# Altium PCB MCORD_AFE.PCBDOC (part 1 of 3)
Units mil, origin at the board's own origin, x right, y up, seen from the top; angles counter-clockwise.
Board outline 2755.91 x 787.4 mil, 4 copper layers (TOP, G1, PWR, BOT), stack 58.685 mil thick; 135 components, 89 nets, 442 pads, 254 vias.
Unrouted connection lines stored in the file: 2.
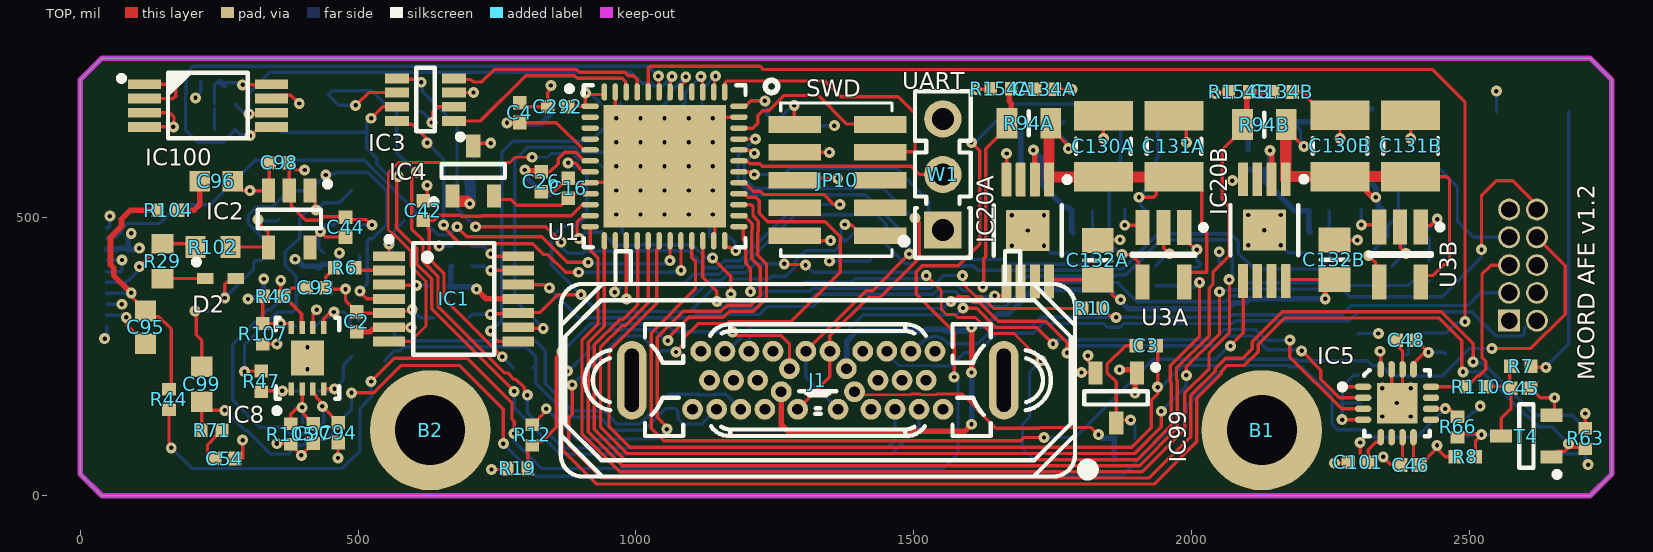
[diagram p0: TOP view]
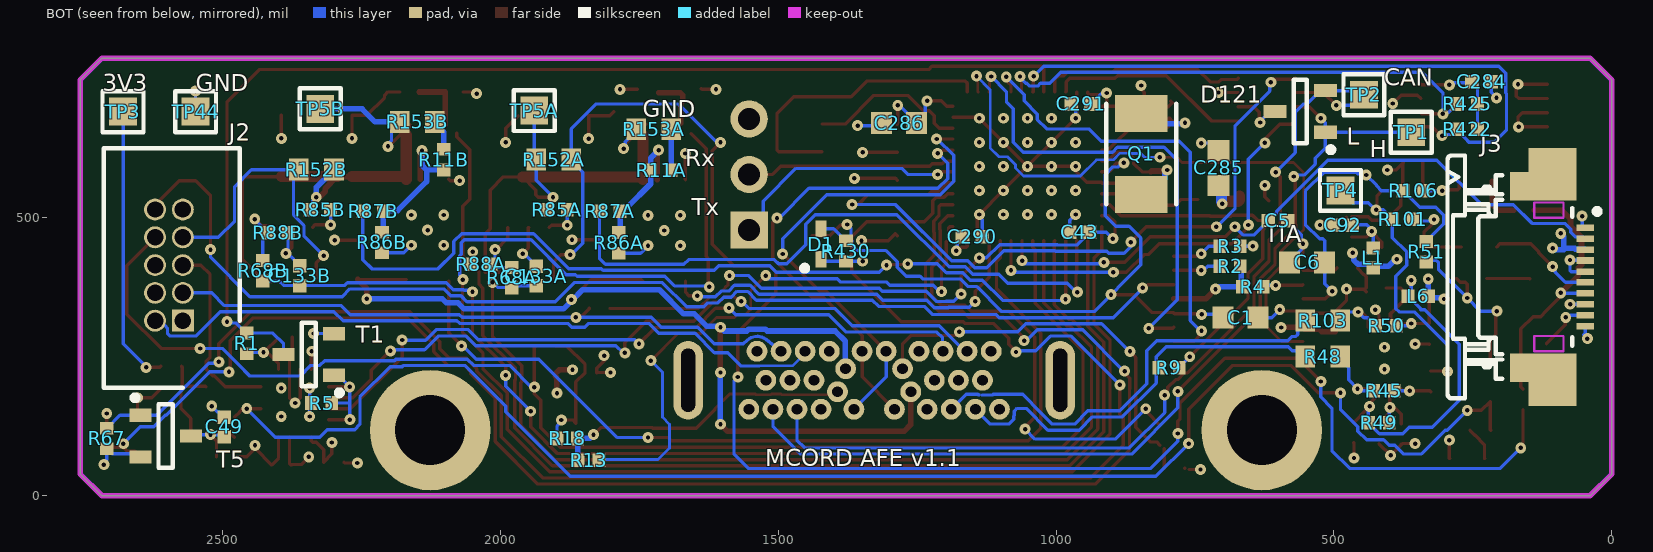
[diagram p1: BOT view, seen from below]
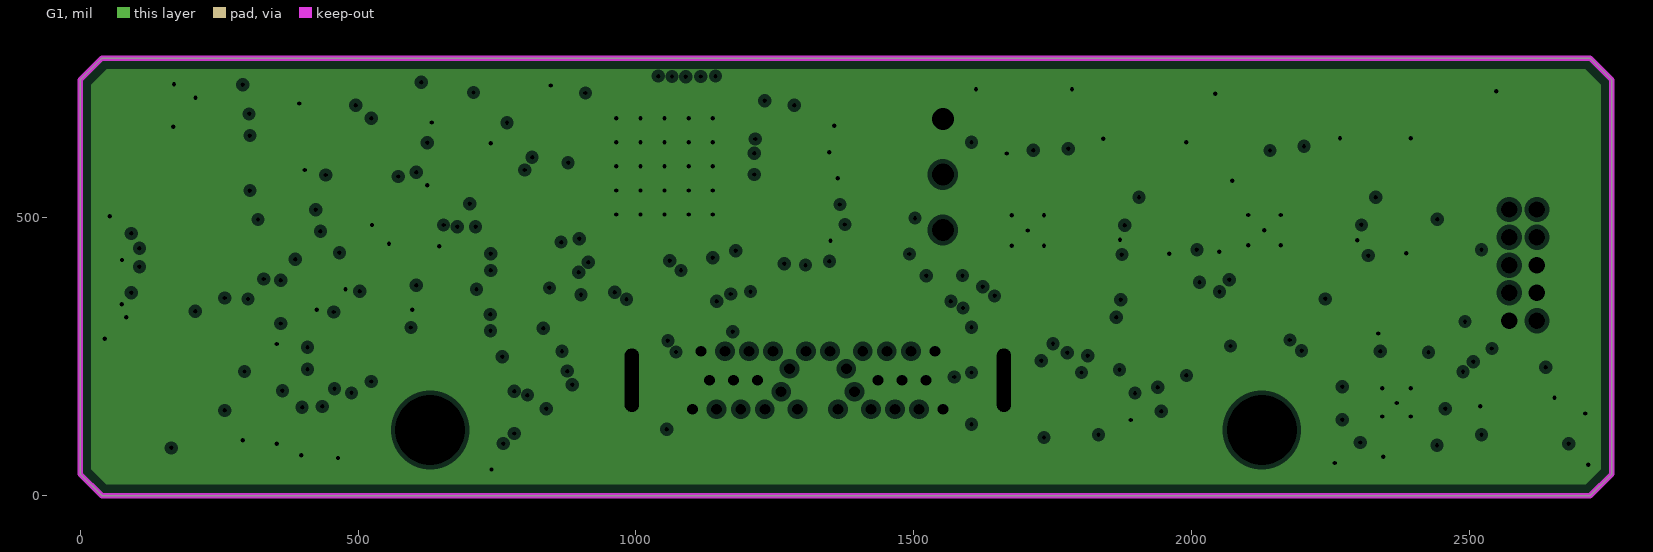
[diagram p2: G1, clearances drawn from the general rule]
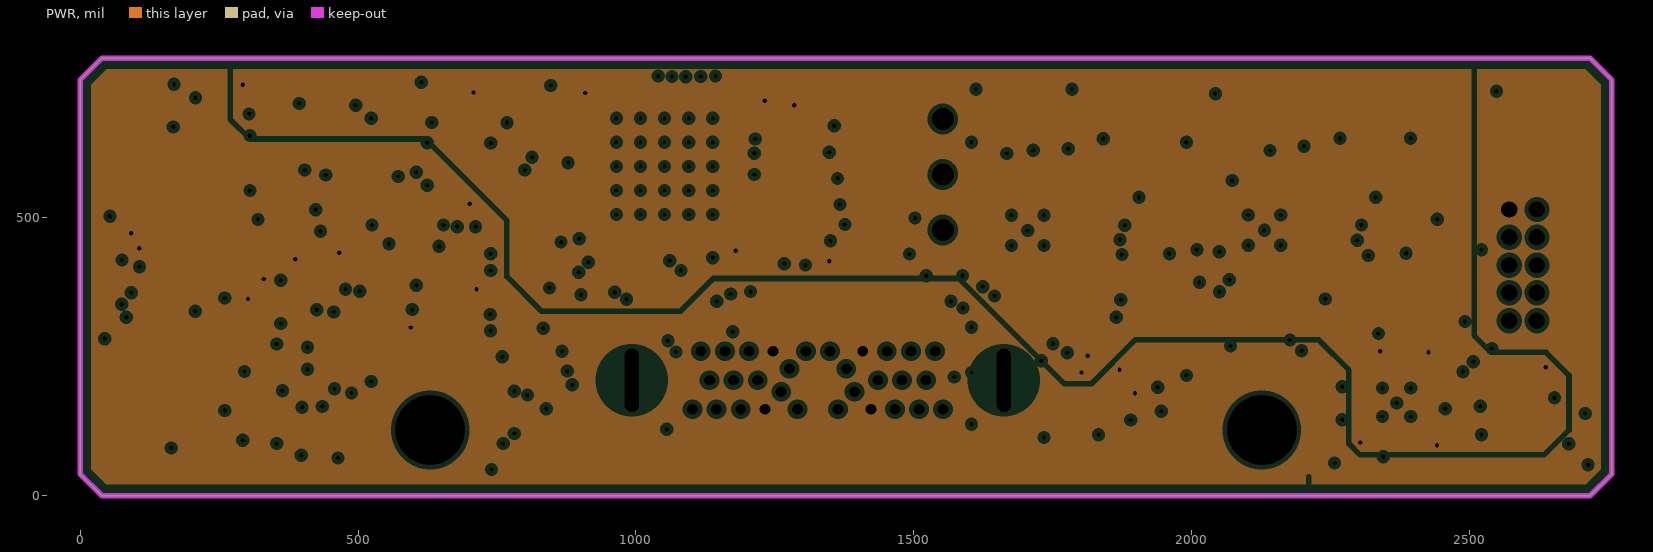
[diagram p3: PWR, clearances drawn from the general rule]
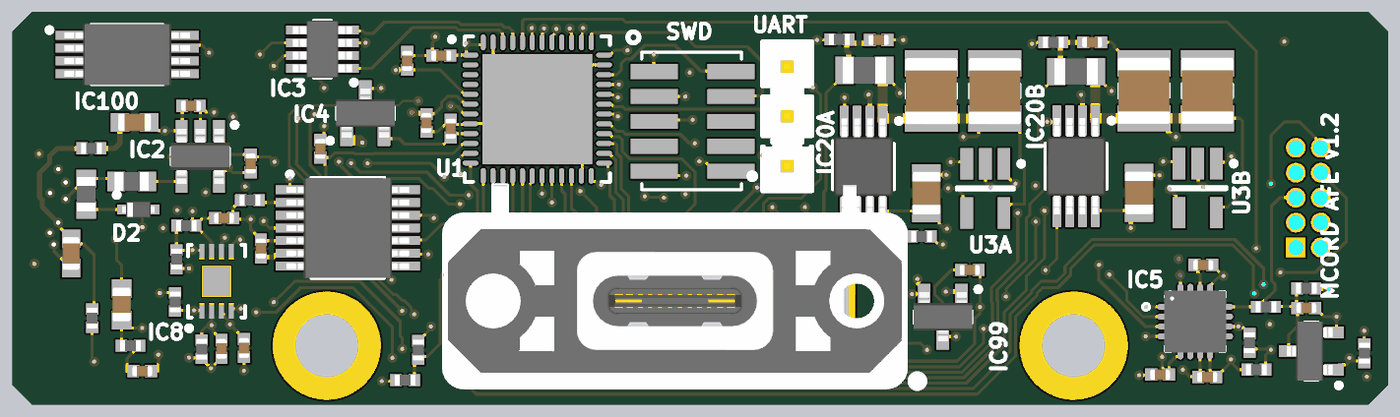
[diagram p5: 3D render of the assembled board from above, using the file's embedded part models]
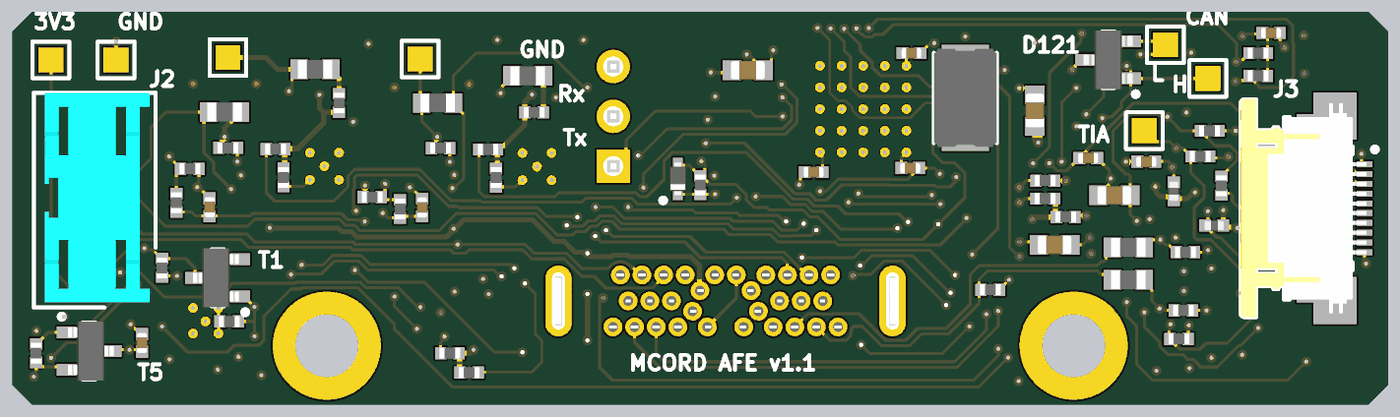
[diagram p6: 3D render of the assembled board from below, using the file's embedded part models]

## Layer stack, top to bottom
TopSolder: solder mask 0.3937, Solder Resist, Dk 3.5
TOP: signal copper 1.3778
Dielectric1: prepreg 7.0866, FR-4, Dk 4.8
G1: plane copper 1.3779, net GND
Dielectric2: core 39, Core-042, Dk 4.6
PWR: plane copper 1.3779, net (Multiple Nets)
Dielectric3: prepreg 7.0866, FR-4, Dk 4.8
BOT: signal copper 1.3778
BottomSolder: solder mask 0.3937, Solder Resist, Dk 3.5

## Board outline
0,39.37 0,748.03 39.37,787.4 2716.54,787.4 2755.91,748.03 2755.91,39.37 2716.54,0 39.37,0

## Design rules (kind name [scope] priority, off if disabled: settings)
AcuteAngle [All] p1: minimum=6.00000000000000E+0001 checktracksonly=FALSE
BoardOutlineClearance [All] p1: gap=10 ignorepadtopadclearanceinfootprint=FALSE except(0: Arc-SplitContinuation Track-SplitContinuation SMDPad-SplitContinuation THPad-SplitContinuation Via-SplitContinuation Fill-SplitContinuation Poly-SplitContinuation Region-SplitContinuation Text-SplitContinuation)
Clearance keepout [All vs OnLayer('KeepOutLayer')] p1: gap=3.94 ignorepadtopadclearanceinfootprint=FALSE
Clearance [All] p2: gap=5 ignorepadtopadclearanceinfootprint=FALSE
Creepage [All] p1: checkdistance=10
DiffPairsRouting [All] p1: maxlimit=20 minlimit=15 mostfreqgap=17 toplayer_minwidth=15 toplayer_maxwidth=15 toplayer_prefwidth=15 bottomlayer_minwidth=15 bottomlayer_maxwidth=15 bottomlayer_prefwidth=15 maxuncoupledlength=500
HoleSize [All] p1: absolutevalues=TRUE maxlimit=200 minlimit=1 maxpercent=80.000 minpercent=20.000
MinimumSolderMaskSliver [All] p1: minsoldermaskwidth=0
MinimumSolderMaskSliver SilkscreenOverComponentPads [All] p2: minsoldermaskwidth=0
PlaneClearance [All] p1: clearance=8
PlaneConnect PlaneConnect_pad [(InPadClass('All Pads'))] p1: planeconnectstyle=Relief reliefexpansion=5 reliefentries=4 reliefconductorwidth=5 reliefairgap=5
PlaneConnect [All] p2: planeconnectstyle=Direct reliefexpansion=20 reliefentries=4 reliefconductorwidth=10 reliefairgap=10
PolygonConnect PolygonConnect_pad [(InPadClass('All Pads'))] p1: connectstyle=Relief reliefconductorwidth=5 reliefentries=4 polygonreliefangle="90 Angle" airgapwidth=5
PolygonConnect [All] p2: connectstyle=Direct reliefconductorwidth=10 reliefentries=4 polygonreliefangle="90 Angle" airgapwidth=10
RoomDefinition U_Detector0 [InComponentClass('U_Detector0')] p1 off: confinementstyle=ConfineIn formatcopy=TRUE lockcomponents=FALSE outline 118.11,710.1 118.11,111.52 495.54,111.52 495.54,710.1
RoomDefinition U_Supply0 [InComponentClass('U_Supply0')] p2 off: confinementstyle=ConfineIn formatcopy=TRUE lockcomponents=FALSE outline 1616.96,316.72 2030.96,316.72 2030.96,735.27 1616.96,735.27
RoomDefinition U_Supply1 [InComponentClass('U_Supply1')] p3 off: confinementstyle=ConfineIn formatcopy=TRUE lockcomponents=FALSE outline 2042.75,317.35 2456.75,317.35 2456.75,735.9 2042.75,735.9
RoomDefinition U_CAN_controller [InComponentClass('U_CAN_controller')] p4 off: confinementstyle=ConfineIn formatcopy=TRUE lockcomponents=FALSE outline 629.92,381.35 1499,381.35 1499,771.35 629.92,771.35
RoomDefinition MCORD_AFE [InComponentClass('MCORD_AFE')] p5 off: confinementstyle=ConfineIn formatcopy=TRUE lockcomponents=FALSE outline 2406.69,47.32 2679.39,47.32 2679.39,151.82 2406.69,151.82
RoutingVias [All] p1: holewidth=7.87 width=19.68 viastyle="Through Hole" minholewidth=7.87 minwidth=19.68 maxholewidth=19.68 maxwidth=39.37 useviatemplates=TRUE viatemplateguid#1={CDEADCA3-E7C7-4804-AE0A-CD5C500E45C9} viatemplatename#1=v50h20m0mx0
SilkToSilkClearance [All] p1: silktosilkclearance=0
SilkToSolderMaskClearance [IsPad] p1: minsilkscreentomaskgap=0 clearancetoexposedcopper=TRUE
SolderMaskExpansion [All] p1: expansion=4 istentingtop=FALSE
ViasUnderSMD ViasUnderSMD_allow [InComponent('IC18') or InComponent('IC10') or InComponent('IC13') or InComponent('IC14') or InComponent('IC15')] p1: allowed=TRUE
ViasUnderSMD [All] p2: allowed=FALSE
Width Width_1 [(InDifferentialPairClass('All Differential Pairs'))] p1: maxlimit=8 minlimit=8 preferedwidth=8
Width [All] p2: maxlimit=100 minlimit=5 preferedwidth=6
23 further rules are at their usual default settings.

## Classes and differential pairs
component class U_Supply0: C130A C131A C132A C133A C134A IC20A R11A R68A R85A R86A R87A R88A R94A R152A R153A R154A TP5A U3A
channel class Supply: U_Supply0 U_Supply1
component class U_Supply1: C130B C131B C132B C133B C134B IC20B R11B R68B R85B R86B R87B R88B R94B R152B R153B R154B TP5B U3B
component class U_Detector0: C6 C44 C54 C92 C93 C94 C95 C96 C97 C98 C99 D2 IC2 IC8 J3 L1 L6 R29 R44 R45 R46 R47 R48 R49 R50 R51 R71 R101 R102 R103 R104 R105 R106 R107 TP4
component class MCORD_AFE: B1 B2 C45 C46 C48 C49 C101 IC5 J1 J2 R1 R5 R7 R8 R9 R10 R12 R13 R18 R19 R63 R66 R67 R110 T1 T4 T5
component class U_CAN_controller: C1 C2 C3 C4 C5 C16 C26 C42 C43 C284 C285 C286 C290 C291 C292 D1 D121 IC1 IC3 IC4 IC11 IC99 IC100 JP10 L10 Q1 R2 R3 R4 R6 R11 R22 R422 R425 R430 TP1 TP2 TP3 TP44 U1 W1

## Components (designator, comment, footprint, x,y, rotation, side; value= is the part's Value field where it differs from the comment)
B1 "Plated Hole" MTG320_550 2125.98,118.11 r0 top locked
B2 "Plated Hole" MTG320_550 629.92,118.11 r0 top locked
C1 "1uF" CAPC1608X87N 668.05,320.4 r0 bottom
C2 "100nF" CAPC1005X55N 498,313 r270 top
C3 "1nF" CAPC1005X55N 1917.92,269.84 r0 top
C4 "22pF" CAPC1005X55N 790.91,689.2 r270 top
C5 "1nF" CAPC1005X55N 600.76,494.38 r0 bottom
C6 "1uF" CAPC1608X87N 548.39,419.85 r180 bottom
C16 "100nF" CAPC1005X55N 878,553.13 r270 top
C26 "22pF" CAPC1005X55N 829.47,564.82 r90 top
C42 "1nF" CAPC1005X55N 617,513 r270 top
C43 "1nF" CAPC1005X55N 957.39,474.36 r180 bottom
C44 "1nF" CAPC1005X55N 477.53,483.3 r270 top
C45 "1nF" CAPC1005X55N 2592,193.72 r180 top
C46 "100nF" CAPC1005X55N 2393.73,55.32 r0 top
C48 "1nF" CAPC1005X55N 2385.64,280 r0 top
C49 "1nF" CAPC1005X55N 2496.23,123.7 r270 bottom
C54 "1nF" CAPC1005X55N 260.29,67 r180 top
C92 "100nF" CAPC1005X55N 484.52,487.05 r180 bottom
C93 "1nF" CAPC1005X55N 424.18,373.92 r180 top
C94 "100nF" CAPC1005X55N 464.23,113.55 r90 top
C95 "100nF" CAPC1608X90N 117.74,303.01 r90 top
C96 "100nF" CAPC1608X90N 244.94,565.94 r180 top
C97 "100nF" CAPC1005X55N 419.11,111.98 r90 top
C98 "22pF" CAPC1005X55N 357.89,599.09 r180 top
C99 "10pF" CAPC1608X87N 218.95,200.79 r90 top
C101 "100nF" CAPC1005X55N 2299.26,60.19 r0 top
C130A "2.2uF" CAPC3225X230N 1840.96,628.67 r270 top (schematic designator C130)
C130B "2.2uF" CAPC3225X230N 2266.75,629.3 r270 top (schematic designator C130)
C131A "2.2uF" CAPC3225X230N 1967.96,628.67 r270 top (schematic designator C131)
C131B "2.2uF" CAPC3225X230N 2393.75,629.3 r270 top (schematic designator C131)
C132A "1uF" CAPC2013X145N 1830.96,423.92 r270 top (schematic designator C132)
C132B "1uF" CAPC2013X145N 2256.75,424.55 r270 top (schematic designator C132)
C133A "100nF" CAPC1005X55N 1934.96,395.27 r270 bottom (schematic designator C133)
C133B "100nF" CAPC1005X55N 2360.75,395.9 r270 bottom (schematic designator C133)
C134A "100nF" CAPC1005X55N 1735.26,731.11 r180 top (schematic designator C134)
C134B "100nF" CAPC1005X55N 2163.07,726.43 r180 top (schematic designator C134)
C284 "100nF" CAPC1005X55N 234.49,745.19 r0 bottom
C285 "1uF" CAPC1608X87N 707.69,589.72 r270 bottom
C286 "1uF" CAPC1608X87N 1282.57,670.53 r180 bottom
C290 "100nF" CAPC1005X55N 1150.6,466.1 r0 bottom
C291 "100nF" CAPC1005X55N 954.9,704.82 r180 bottom
C292 "100nF" CAPC1005X55N 859.26,699.78 r0 top
D1 "1PS79SB70" SODFL1608X65N 1422.82,452.74 r90 bottom
D2 "1PS79SB70" SODFL1608X65N 252.43,390.98 r0 top
D121 "PESD1CAN-UX" SOT95P237X112-3N 560.78,691.46 r0 bottom
IC1 "AD8402ARUZ1" SOP65P640X120-14N 672,354.24 r0 top
IC2 "AD8009JRTZ-REEL7" SOT95P280X145-5N 376.39,497.72 r270 top
IC3 "TCAN332GDCNT" SOT65P280X145-8N 621.18,712.61 r180 top
IC4 "NCP51460SN33T1G" SOT95P240X110-3N 707.33,584.27 r90 top
IC5 "NB6L611MNG" QFN50P300X300X100-17N-S185 2369.42,166.43 r0 top
IC8 "LMH6552SD" SDA08C 409.11,247.51 r90 top
IC20A "TPS7A4001DGNR" DGN0008B_M 1704.96,477.27 r270 top (schematic designator IC20)
IC20B "TPS7A4001DGNR" DGN0008B_M 2130.75,477.9 r270 top (schematic designator IC20)
IC99 "AP7313-33SAG-7" SOT95P240X130-3N 1864,176 r270 top
IC100 "M24256-BRDW6" SOP65P640X120-8N 230,702 r0 top
J1 "USB C" AMPHENOL_MUSBRM5C1M0 1327.35,207.83 r180 top locked
J2 "CON_IDC10_1.27_45210-600230" SHDR10W38P127_2X5_1069X594X747P 2571,314.96 r90 bottom locked
J3 "FFC/FPC" MOLEX_52745-1097 47.69,393.7 r270 bottom locked
JP10 "M50-3600542" PLHTD10S-TR-CV 1362.46,442.84 r270 top
L1 "120R@100MHz" INDC1005X55N 429.4,427.8 r270 bottom
L6 "120R@100MHz" INDC1005X55N 348.48,359.07 r180 bottom
Q1 "8MHz" XTAL_TXC_7A 847,614.91 r270 bottom
R1 "5k1" RESC1005X40N 2456.03,274.24 r270 bottom
R2 "1k" RESC1005X40N 687,413 r180 bottom
R3 "1k" RESC1005X40N 687,449 r0 bottom
R4 "1k" RESC1005X40N 646,376 r0 bottom
R5 "5k1" RESC1005X40N 2321.47,166.88 r180 bottom
R6 "1k" RESC1005X40N 476,410 r0 top
R7 "5k1" RESC1005X40N 2592,233 r0 top
R8 "5k1" RESC1005X40N 2492,70 r180 top
R9 "10k" RESC1005X40N 797,230.31 r0 bottom
R10 "10k" RESC1005X40N 1821.46,337.18 r180 top
R11A "2k" RESC1005X40N 1710.78,586 r180 bottom (schematic designator R11)
R11B "2k" RESC1005X40N 2101.61,604.72 r90 bottom (schematic designator R11)
R12 "5k1" RESC1005X40N 813.15,109.41 r270 top
R13 "5k1" RESC1005X40N 1840.96,64.13 r0 bottom
R18 "5k1" RESC1005X40N 1879.46,103.03 r180 bottom
R19 "5k1" RESC1005X40N 786.91,49.08 r0 top
R29 "22" RESC1608X55N 148,421.78 r90 top
R44 "10k" RESC1005X40N 159.9,173.23 r270 top
R45 "270" RESC1005X40N 410.11,188.82 r0 bottom
R46 "240" RESC1005X40N 348.48,359.07 r0 top
R47 "120" RESC1005X40N 326.11,205.82 r270 top
R48 "22" RESC1608X55N 520.41,250.52 r0 bottom
R49 "510" RESC1005X40N 419.11,131.66 r0 bottom
R50 "270" RESC1005X40N 406.11,305.82 r0 bottom
R51 "47k" RESC1005X40N 334,439 r90 bottom
R63 "10k" RESC1005X40N 2708.21,103.03 r90 top
R66 "240" RESC1005X40N 2478.12,123.7 r90 top
R67 "10k" RESC1005X40N 2708.21,103.03 r270 bottom
R68A "10k" RESC1005X40N 1979.39,392.24 r270 bottom (schematic designator R68)
R68B "10k" RESC1005X40N 2427.36,404.87 r270 bottom (schematic designator R68)
R71 "49R9" RESC1005X40N 236.67,118.11 r180 top
R85A "300" RESC1005X40N 1897.96,514.27 r0 bottom (schematic designator R85)
R85B "300" RESC1005X40N 2323.75,514.9 r0 bottom (schematic designator R85)
R86A "1k5" RESC1005X40N 1786.96,455.07 r90 bottom (schematic designator R86)
R86B "1k5" RESC1005X40N 2212.75,455.7 r90 bottom (schematic designator R86)
R87A "16k" RESC1005X40N 1802.96,511.6 r180 bottom (schematic designator R87)
R87B "16k" RESC1005X40N 2228.75,512.23 r180 bottom (schematic designator R87)
R88A "10k" RESC1005X40N 2035.06,416.12 r0 bottom (schematic designator R88)
R88B "10k" RESC1005X40N 2400.34,472.87 r180 bottom (schematic designator R88)
R94A "33k" RESC2012X60N 1707.02,670.28 r0 top (schematic designator R94)
R94B "33k" RESC2012X60N 2130.75,667.84 r0 top (schematic designator R94)
R101 "5k1" RESC1005X40N 376.39,497.72 r0 bottom
R102 "22" RESC1608X55N 239.05,447.44 r0 top
R103 "22" RESC1608X55N 520.41,315.17 r0 bottom
R104 "270" RESC1005X40N 158.32,513.78 r0 top
R105 "510" RESC1005X40N 379.11,111.04 r90 top
R106 "1k" RESC1005X40N 357.5,548.9 r0 bottom
R107 "240" RESC1005X40N 328.79,291.33 r90 top
R110 "240" RESC1005X40N 2511,195.96 r180 top
R152A "10k" RESC1608X55N 1903.95,604.72 r0 bottom (schematic designator R152)
R152B "10k" RESC1608X55N 2330.76,586.69 r180 bottom (schematic designator R152)
R153A "75k" RESC1608X55N 1723.77,659.28 r0 bottom (schematic designator R153)
R153B "75k" RESC1608X55N 2149.56,672.5 r0 bottom (schematic designator R153)
R154A "1k5" RESC1005X40N 1656.72,732.33 r0 top (schematic designator R154)
R154B "1k5" RESC1005X40N 2085.15,726.43 r0 top (schematic designator R154)
R422 "1k" RESC1005X40N 260.29,659.28 r180 bottom
R425 "1k" RESC1005X40N 260.29,704.82 r180 bottom
R430 "10k" RESC1005X40N 1377.95,440.2 r90 bottom
T1 "BSH103" SOT95P230X110-3N 2344.54,254.14 r0 bottom
T4 "BSH103" SOT95P230X110-3N 2601.97,107.38 r180 top
T5 "BSH103" SOT95P230X110-3N 2601.97,107.38 r180 bottom
TP1 "Test Point" TPS127 361,654.06 r90 bottom
TP2 "Test Point" TPS127 446.11,721.5 r180 bottom
TP3 "Test Point" TPS127 2678.74,691.09 r180 bottom
TP4 "Test Point" TPS127 488.32,549.26 r180 bottom
TP5A "Test Point" TPS127 1939,693 r90 bottom (schematic designator TP5)
TP5B "Test Point" TPS127 2324,696 r90 bottom (schematic designator TP5)
TP44 "Test Point" TPS127 2548.14,691.09 r90 bottom
U1 "STM32F072CBU6" STM-UFQFPN48_L 1051.52,592.57 r0 top
U3A "LTC6101HVCCS5#TR" LT-S5-5-TSOT-23_M 1948.96,433.46 r270 top (schematic designator U3)
U3B "LTC6101HVCCS5#TR" LT-S5-5-TSOT-23_M 2374.75,434.09 r270 top (schematic designator U3)
W1 "Header 3" SAMTEC_HTSW-103-23-L-S 1552.16,478 r90 top

## Footprints (in the part's own frame and the unit in brackets; to place one, negate y for a bottom-side part, rotate by r counter-clockwise, add the part's x,y. Pads: shape width x height; smd on the part's side, far side on the other; paste and mask are expansions set on the pad)
AMPHENOL_MUSBRM5C1M0 [mm] "1 Port Vertical Receptacle 24 Contacts Rugged USB Type C Input Output Connector"
  round 0.95 hole 0.5: A1(-5.725,1.325) A2(-4.625,1.325) A3(-3.525,1.325) A4(-2.425,1.325) A5(-1.675,0.525) A6(-0.925,1.325) A7(0.925,1.325) A8(1.675,0.525) A9(2.425,1.325) A10(3.525,1.325) A11(4.625,1.325) A12(5.725,1.325) B1(5.35,-1.325) B2(4.25,-1.325) B3(3.15,-1.325) B4(2.05,-1.325) B5(1.3,-0.525) B6(0.55,-1.325) B7(-0.55,-1.325) B8(-1.3,-0.525) B9(-2.05,-1.325) B10(-3.15,-1.325) B11(-4.25,-1.325) B12(-5.35,-1.325) G1(-4.95,0) G2(-3.85,0) G3(-2.75,0) G4(2.75,0) G5(3.85,0) G6(4.95,0)
  oval 1.35x3.6 hole 0.65 slot 2.9 at 90 deg: SHIELD(-8.5,0) SHIELD(8.5,0)
  silkscreen extent -12.59,-5.9 11.75,4.4, body extent -11.75,-5.9 11.75,4.4, height 14.95
CAPC1005X55N [mm] "Capacitor, Non-Polarized, Chip; 1.00mm L X 0.50mm W X 0.70mm H, IPC Medium Density"
  rect 0.62x0.62 smd: 1(-0.45,0) 2(0.45,0)
  body extent -0.52,-0.27 0.53,0.28, height 0.55
CAPC1608X87N [mm] "Chip Capacitor, Body 1.6x0.8mm IPC Medium Density"
  rect 0.95x1 smd: 1(-0.8,0) 2(0.8,0)
  body extent -0.87,-0.47 0.88,0.48, height 0.87
CAPC1608X90N [mm] "Chip Capacitor, Body 1.6x0.8mm IPC Medium Density"
  rect 0.95x0.95 smd: 1(-0.75,0) 2(0.75,0)
  body extent -0.85,-0.45 0.85,0.45, height 0.9
CAPC2013X145N [mm] "Capacitor, Non-Polarized, Chip; 2.00mm L X 1.25mm W X 1.45mm H, IPC Medium Density"
  rect 1.15x1.45 smd: 1(-0.9,0) 2(0.9,0)
  silkscreen extent 0,-0.63 0,0.63, body extent -1.1,-0.72 1.1,0.73, height 1.45
CAPC3225X230N [mm] "Chip Capacitor, Body 3.2x2.5mm, IPC Medium Density"
  rect 1.35x2.7 smd: 1(-1.4,0) 2(1.4,0)
  silkscreen extent -0.35,-1.25 0.35,1.25, body extent -1.7,-1.35 1.7,1.35, height 2.3
DGN0008B_M [mm] "TSOP, 8-Leads, Body 3.1x3.1mm, Pitch 0.65mm, Thermal Pad 1.9x1.88mm, IPC Low Density"
  rrect22% 1.55x0.45 smd: 1(-2.325,0.975) 2(-2.325,0.325) 3(-2.325,-0.325) 4(-2.325,-0.975) 5(2.325,-0.975) 6(2.325,-0.325) 7(2.325,0.325) 8(2.325,0.975)
  rrect5% 1.88x1.98 smd: 9(0,0)
  silkscreen extent -2.45,-1.55 1.15,1.92, body extent -2.45,-1.5 2.45,1.5, height 0.94
INDC1005X55N [mm] "Chip Inductor, 2-Leads, EIA 0402, Metric 1005, Body 1x0.5mm, 0402IPC Medium Density"
  rect 0.6x0.62 smd: 1(-0.46,0) 2(0.46,0)
  body extent -0.52,-0.27 0.53,0.28, height 0.55
LT-S5-5-TSOT-23_M [mm] "SOT23, 5-Leads, Body 2.90x1.63mm, Pitch 0.95mm, IPC Low Density"
  rect 1.6x0.65 smd: 1(-1.25,0.95) 2(-1.25,0) 3(-1.25,-0.95) 4(1.25,-0.95) 5(1.25,0.95)
  silkscreen extent -1.37,-1.45 0.05,1.95, body extent -0.87,-1.45 0.87,1.45, height 1
MOLEX_52745-1097 [mm] "10 Contacts, 0.5mm Pitch, Right Angled Surface Mount FPC Connector, ZIF, Top Contact Style"
  rect 0.3x0.8 smd: 1(-2.25,0) 2(-1.75,0) 3(-1.25,0) 4(-0.75,0) 5(-0.24,0) 6(0.25,0) 7(0.75,0) 8(1.25,0) 9(1.75,0) 10(2.25,0)
  rect 1.1x2.2 smd: MECH(-5.35,-1.5) MECH(5.35,-1.5)
  rect 1.3x3.05 smd: MECH(-4.15,-1.925) MECH(4.15,-1.925)
  TOP keep-out lines w0.1: 3.4,-1 2.7,-1 2.7,-2.34 3.4,-2.34 3.4,-1 ; -2.7,-1 -2.7,-2.34 -3.4,-2.34 -3.4,-1 -2.7,-1
  silkscreen extent -5.55,-6.3 5.55,0.66, body extent -5.55,-6.3 5.55,0.1, height 2
MTG320_550 [mm] "Plated Through Hole: Hole Dia.=3.2mm Pad Dia.=5.5mm"
  round 5.5 hole 3.2: 1(0,0)
PLHTD10S-TR-CV [mm] "SMT 1.27 mm dual goldpin"
  rect 0.76x2.4 smd: 1(-5.715,-1.95) 2(-5.715,1.95) 3(-4.445,-1.95) 4(-4.445,1.95) 5(-3.175,-1.95) 6(-3.175,1.95) 7(-1.905,-1.95) 8(-1.905,1.95) 9(-0.635,-1.95) 10(-0.635,1.95)
  silkscreen extent -6.7,-2.58 0.3,2.5, body extent -6.5,-2.15 0.1,2.15, height 4.5
QFN50P300X300X100-17N-S185 [mm] "QFN,0.50mm pitch,square; 4 pin X 4 pin, 3mm X 3mm X 1.00mm H body (w/thermal tab 1.85 X 1.85mm),  IPC Medium Density"
  oval 0.75x0.3 smd: 1(-1.55,0.75) 2(-1.55,0.25) 3(-1.55,-0.25) 4(-1.55,-0.75) 9(1.55,-0.75) 10(1.55,-0.25) 11(1.55,0.25) 12(1.55,0.75)
  oval 0.3x0.75 smd: 5(-0.75,-1.55) 6(-0.25,-1.55) 7(0.25,-1.55) 8(0.75,-1.55) 13(0.75,1.55) 14(0.25,1.55) 15(-0.25,1.55) 16(-0.75,1.55)
  rect 1.85x1.85 smd: 17(0,0)
  silkscreen extent -2.62,-1.5 1.5,1.5, body extent -1.57,-1.57 1.58,1.58, height 1
RESC1005X40N [mm] "Chip Resistor, EIA 0402, Metric 1005, Body 1.0x0.5mm, IPC Medium Density"
  rect 0.58x0.62 smd: 1(-0.47,0) 2(0.47,0)
  body extent -0.52,-0.27 0.53,0.28, height 0.4
RESC1608X55N [mm] "Chip Resistor, EIA 0603, Metric 1608, Body 1.6x0.8mm, IPC Medium Density"
  rect 0.9x1 smd: 1(-0.8,0) 2(0.8,0)
  body extent -0.87,-0.47 0.88,0.48, height 0.55
RESC2012X60N [mm] "Chip Resistor, EIA 0805, Metric 2012, Body 2.0x1.2mm, IPC Medium Density"
  rect 0.95x1.4 smd: 1(-1,0) 2(1,0)
  silkscreen extent 0,-0.55 0,0.55, body extent -1.1,-0.67 1.1,0.68, height 0.6
SAMTEC_HTSW-103-23-L-S [mm] "3 Contacts - Pitch 2.54mm - Single Row  Through Mount Straigh Header (Post Lead 5.84mm, Tail Lead 2.92mm, Insulator 2.54mm)"
  rect 1.7x1.7 hole 1: 1(0,0)
  round 1.7 hole 1: 2(2.54,0) 3(5.08,0)
  silkscreen extent -1.27,-1.27 6.35,1.93, body extent -1.27,-1.27 6.35,1.27, height 8.38
SDA08C [mm] "SON, 8-Leads, Body 2.5x3mm, Pitch 0.5mm, NSC Recommended"
  rect 0.6x0.25 smd paste-0.125 mask+0.051: 1(-1.4,0.75) 2(-1.4,0.25) 3(-1.4,-0.25) 4(-1.4,-0.75) 5(1.4,-0.75) 6(1.4,-0.25) 7(1.4,0.25) 8(1.4,0.75)
  rect 1.6x1.5 smd paste-0.05 mask+0.051: 9(0,0)
  silkscreen extent -2.52,-1.45 1.85,1.52, body extent -1.55,-1.3 1.55,1.3, height 0.8
SHDR10W38P127_2X5_1069X594X747P [mm]
  rect 1x1 hole 0.75: 1(0,0)
  round 1 hole 0.75: 2(0,1.27) 3(1.27,0) 4(1.27,1.27) 5(2.54,0) 6(2.54,1.27) 7(3.81,0) 8(3.81,1.27) 9(5.08,0) 10(5.08,1.27)
  silkscreen extent -3.06,-2.59 7.88,3.61, body extent -2.79,-2.29 7.87,3.05, height 5.65
SODFL1608X65N [mm] "Ultra Small Outline Diode Flat Lead (SOD-523), Body; 1.2mm L X 0.8mm W X 0.65mm H, IPC Medium Density"
  rect 0.75x0.5 smd: 1(-0.7,0) 2(0.7,0)
  silkscreen extent -1.22,0.63 -0.98,0.88, body extent -0.82,-0.42 0.83,0.43, height 0.65
SOP65P640X120-8N [mm] "SOP, 0.65mm pitch; 8 pin, 4.40mm W X 3.00mm L X 1.20mm H body, IPC Medium Density"
  rect 1.5x0.45 smd: 1(-2.9,0.975) 2(-2.9,0.325) 3(-2.9,-0.325) 4(-2.9,-0.975) 5(2.9,-0.975) 6(2.9,-0.325) 7(2.9,0.325) 8(2.9,0.975)
  silkscreen extent -4.08,-1.5 1.83,1.5, body extent -3.2,-1.55 3.2,1.55, height 1.2
SOP65P640X120-14N [mm] "SOP, 14-Leads, Body 5.1x4.5mm (max), Pitch 0.65mm, IPC Medium Density"
  rect 1.45x0.45 smd: 1(-2.95,1.95) 2(-2.95,1.3) 3(-2.95,0.65) 4(-2.95,0) 5(-2.95,-0.65) 6(-2.95,-1.3) 7(-2.95,-1.95) 8(2.95,-1.95) 9(2.95,-1.3) 10(2.95,-0.65) 11(2.95,0) 12(2.95,0.65) 13(2.95,1.3) 14(2.95,1.95)
  silkscreen extent -3.07,-2.55 1.85,2.85, body extent -3.12,-2.55 3.12,2.55, height 1.2
SOT65P280X145-8N [mm] "SOT, 0.65mm pitch; 8 pin, 1.625mm W X 2.90mm L X 1.45mm H body, IPC Medium Density"
  rect 1.1x0.45 smd: 1(-1.3,0.975) 2(-1.3,0.325) 3(-1.3,-0.325) 4(-1.3,-0.975) 5(1.3,-0.975) 6(1.3,-0.325) 7(1.3,0.325) 8(1.3,0.975)
  silkscreen extent -1.73,-1.45 0.43,1.82, body extent -1.51,-1.45 1.51,1.45, height 1.2
SOT95P230X110-3N [mm] "SOT23, 3 pin, Pitch 0.95mm - 1.3mm W X 2.9mm L X 1.1mm H, IPC Medium Density"
  rect 1x0.6 smd: 1(-1.15,0.95) 2(-1.15,-0.95) 3(1.15,0)
  silkscreen extent -1.52,-1.45 0.33,1.87, body extent -1.08,-1.5 1.25,1.5, height 1.1
SOT95P237X112-3N [mm] "SOT, 0.95mm, pitch; 3 pin,1.30mm W X 2.92mm L X 1.12mm H body, IPC Medium Density"
  rect 1.05x0.6 smd: 1(-1.15,0.95) 2(-1.15,-0.95) 3(1.15,0)
  silkscreen extent -1.52,-1.45 0.3,1.87, body extent -1.25,-1.5 1.25,1.5, height 1.1
SOT95P240X110-3N [mm] "SOT23 3-Leads, Pitch 0.95mm, Body 1.3x2.9mm, IPC Medium Density"
  rect 1.05x0.65 smd: 1(-1.15,0.95) 2(-1.15,-0.95) 3(1.15,0)
  silkscreen extent -1.52,-1.45 0.3,1.92, body extent -1.25,-1.5 1.25,1.5, height 1.1
SOT95P240X130-3N [mm] "SOT23 3-Leads, Pitch 0.95mm - Body 1.3x2.9mm, IPC Medium Density"
  rect 1.05x0.65 smd: 1(-1.15,0.95) 2(-1.15,-0.95) 3(1.15,0)
  silkscreen extent -1.52,-1.45 0.3,1.92, body extent -1.25,-1.5 1.25,1.5, height 1.3
SOT95P280X145-5N [mm] "SOT, 0.95mm pitch; 5 pin, 1.60mm W X 2.90mm L X 1.45mm H body, IPC Medium Density"
  rect 1.1x0.6 smd: 1(-1.3,0.95) 2(-1.3,0) 3(-1.3,-0.95) 4(1.3,-0.95) 5(1.3,0.95)
  silkscreen extent -1.72,-1.45 0.43,1.88, body extent -1.4,-1.5 1.4,1.5, height 1.45
STM-UFQFPN48_L [mm] "QFN, 48-Leads, Body 7.1x7.1mm, Pitch 0.5mm, Thermal Pad 5.6x5.6mm, IPC High Density"
  oval 0.8x0.25 smd: 1(-3.4,2.75) 2(-3.4,2.25) 3(-3.4,1.75) 4(-3.4,1.25) 5(-3.4,0.75) 6(-3.4,0.25) 7(-3.4,-0.25) 8(-3.4,-0.75) 9(-3.4,-1.25) 10(-3.4,-1.75) 11(-3.4,-2.25) 12(-3.4,-2.75) 25(3.4,-2.75) 26(3.4,-2.25) 27(3.4,-1.75) 28(3.4,-1.25) 29(3.4,-0.75) 30(3.4,-0.25) 31(3.4,0.25) 32(3.4,0.75) 33(3.4,1.25) 34(3.4,1.75) 35(3.4,2.25) 36(3.4,2.75)
  oval 0.25x0.8 smd: 13(-2.75,-3.4) 14(-2.25,-3.4) 15(-1.75,-3.4) 16(-1.25,-3.4) 17(-0.75,-3.4) 18(-0.25,-3.4) 19(0.25,-3.4) 20(0.75,-3.4) 21(1.25,-3.4) 22(1.75,-3.4) 23(2.25,-3.4) 24(2.75,-3.4) 37(2.75,3.4) 38(2.25,3.4) 39(1.75,3.4) 40(1.25,3.4) 41(0.75,3.4) 42(0.25,3.4) 43(-0.25,3.4) 44(-0.75,3.4) 45(-1.25,3.4) 46(-1.75,3.4) 47(-2.25,3.4) 48(-2.75,3.4)
  rect 5.6x5.6 smd: 49(0,0)
  silkscreen extent -4.47,-3.7 3.7,3.7, body extent -3.55,-3.55 3.55,3.55, height 0.6
TPS127 [mil] "1.27 x  1.27mm SMD Test Point Area"
  rect 50x50 smd paste-50: 1(0,0)
  silkscreen extent -37,-37 37,37
XTAL_TXC_7A [mm] "2 Pins, 3.2x5mm, SMD Glass Seam Sealing Crystal, 7A Serie"
  rect 1.7x2.4 smd: 1(-1.85,0) 2(1.85,0)
  silkscreen extent -2.3,-1.6 2.3,1.6, body extent -2.5,-1.6 2.5,1.6, height 1.2

## Part data
B1 B2: library part PLATED_HOLE3.2_PAD5.5, "Single Terminal Socket", Author="CERN DEM JMW", ComponentHeight=0mm, Component Type="Standard (No BOM)", CreateDate=01.10.2012, Family="Plated Hole", HelpURL=Undefined, LatestRevisionDate=01.10.2012, Mounted=No, PackageDescription="Plated Through Hole: Hole Dia.=3.2mm Pad Dia.=5.5mm", Part Description="Plated Through Hole: Hole Dia.=3.2mm Pad Dia.=5.5mm", Part Number=PLATED_HOLE3.2_PAD5.5, Pin Count=1, Sense=No, SMD=No, Socket=No, Status=None
C1 C6 C285 C286: library part CC0603_1UF_16V_10%_X7R, "Non-polarised capacitor", Case=0603, Manufacturer=GENERIC, Manufacturer1 ComponentHeight=0.9mm, Manufacturer1 Example="YAGEO PHYCOMP", Manufacturer1 Part Number=223878615663, Manufacturer Part Number=CC0603_1uF_16V_10%_X7R, Tolerance=±10%, Voltage=16V, Author="CERN DEM JLC", Component Type=Standard, CreateDate=03.12.2007, HelpURL=\\cern.ch\dfs\Applications\Altium\Datasheets\CC0603_X7R_PHYCOMP.pdf, LatestRevisionDate=17.04.2015, Mounted=Yes, Part Description="SMD Multilayer Chip Ceramic Capacitor", Part Number=CC0603_1UF_16V_10%_X7R, Pin Count=2, Sense=No, SMD=Yes, Socket=No, Status=None, TC=X7R
C2 C16 C46 C92 C94 C97 C101 C133A C133B C134A C134B C284 C290 C291 C292: library part CC0402_100NF_16V_10%_X7R, "Non-polarised capacitor", Case=0402, Manufacturer=GENERIC, Manufacturer1 ComponentHeight=0.55mm, Manufacturer1 Example=MURATA, Manufacturer1 Part Number=GRM155R71C104KA88D, Tolerance=±10%, Voltage=16V, Author="CERN DEM JLC", Component Type=Standard, CreateDate=05.12.2013, HelpURL=\\cern.ch\dfs\Applications\Altium\Datasheets\CC0402_X7R_MURATA_GRM.pdf, LatestRevisionDate=03.12.2007, Manufacturer Part Number=CC0402_100NF_16V_10%_X7R, Mounted=Yes, Part Description="SMD Multilayer Chip Ceramic Capacitor", Part Number=CC0402_100NF_16V_10%_X7R, Pin Count=2, Sense=No, SMD=Yes, Socket=No, Status="Not Recommended", TC=X7R
C3 C5 C42 C43 C44 C45 C48 C49 C54 C93: library part CC0402_1NF_50V_5%_C0G, "Non-polarised capacitor", Case=0402, Manufacturer=GENERIC, Manufacturer1 ComponentHeight=0.55mm, Manufacturer1 Example=KEMET, Manufacturer1 Part Number=C0402C102J5GACTU, Tolerance=±5%, Voltage=50V, Author="CERN DEM BC", Component Type=Standard, CreateDate=02/09/2019, HelpURL="\\cern.ch\dfs\Applications\Altium\Datasheets\CC0402_C0G_KEMET_(Commercial Grade).pdf", LatestRevisionDate=02/09/2019, Manufacturer Part Number=CC0402_1NF_50V_5%_C0G, Mounted=Yes, Part Description="SMD Multilayer Chip Ceramic Capacitor", Part Number=CC0402_1NF_50V_5%_C0G, Pin Count=2, Sense=No, SMD=Yes, Socket=No, Status=Preferred, TC=C0G/NP0
C4 C26 C98: library part CC0402_22PF_50V_5%_C0G, "Non-polarised capacitor", Case=0402, Manufacturer=GENERIC, Manufacturer1 ComponentHeight=0.55mm, Manufacturer1 Example=KEMET, Manufacturer1 Part Number=C0402C220J5GACTU, Tolerance=±5%, Voltage=50V, Author="CERN DEM JLC", Component Type=Standard, CreateDate=03.12.2007, HelpURL="\\cern.ch\dfs\Applications\Altium\Datasheets\CC0805_C0G_KEMET_(Commercial Grade).pdf", LatestRevisionDate=03.12.2007, Manufacturer Part Number=CC0402_22PF_50V_5%_C0G, Mounted=Yes, Part Description="SMD Multilayer Chip Ceramic Capacitor", Part Number=CC0402_22PF_50V_5%_C0G, Pin Count=2, Sense=No, SMD=Yes, Socket=No, Status=Preferred, TC=C0G/NP0
C95 C96: library part CC0603_100NF_100V_10%_X7R, "Non-polarised capacitor", Case=0603, Manufacturer=GENERIC, Manufacturer1 ComponentHeight=0.9mm, Manufacturer1 Example=MURATA, Manufacturer1 Part Number=GRM188R72A104KA35D, Tolerance=±10%, Voltage=100V, Author="CERN DEM JLC", Component Type=Standard, CreateDate=11.12.2013, HelpURL=\\cern.ch\dfs\Applications\Altium\Datasheets\CC0603_MURATA_GRM188R72A104KA35D.pdf, LatestRevisionDate=11.12.2013, Manufacturer Part Number=CC0603_100NF_100V_10%_X7R, Mounted=Yes, Part Description="SMD Multilayer Chip Ceramic Capacitor", Part Number=CC0603_100NF_100V_10%_X7R, Pin Count=2, Sense=No, SMD=Yes, Socket=No, Status=None, TC=X7R
C99: library part CC0603_10PF_50V_5%_NP0, "Non-polarised capacitor", Case=0603, Manufacturer=GENERIC, Manufacturer1 ComponentHeight=0.87mm, Manufacturer1 Example=PHYCOMP, Manufacturer1 Part Number=223886715109, Tolerance=±5%, Voltage=50V, Author="CERN DEM JLC", Component Type=Standard, CreateDate=03.12.2007, HelpURL=\\cern.ch\dfs\Applications\Altium\Datasheets\CC0603_NP0_PHYCOMP.pdf, LatestRevisionDate=03.12.2007, Manufacturer Part Number=CC0603_10PF_50V_5%_NP0, Mounted=Yes, Part Description="SMD Multilayer Chip Ceramic Capacitor", Part Number=CC0603_10PF_50V_5%_NP0, Pin Count=2, Sense=No, SMD=Yes, Socket=No, Status=Preferred, TC=C0G/NP0
C130A C130B C131A C131B: library part CC1210_2.2UF_100V_10%_X7R_MURATA_GCJ32DR72A225KA01L, "Non-polarised capacitor", Case=1210, Manufacturer=MURATA, Manufacturer Part Number=GCJ32DR72A225KA01L, Tolerance=±10%, Voltage=100V, Author="CERN DEM JLC", ComponentHeight=2.3mm, Component Type=Standard, CreateDate=10.05.2017, HelpURL=\\cern.ch\dfs\Applications\Altium\Datasheets\CC1210_MURATA_GCJ32DR72A225KA01L.pdf, LatestRevisionDate=10.05.2017, Mounted=Yes, Part Description="Soft Termination SMD Chip Monolithic Ceramic Capacitor for Automotive", Part Number=CC1210_2.2UF_100V_10%_X7R_MURATA_GCJ32DR72A225KA01L, Pin Count=2, Sense=No, SMD=Yes, Socket=No, Status="Not Recommended", TC=X7R
C132A C132B: library part CC0805_1UF_100V_10%_X7S, "Non-polarised capacitor", Case=0805, Manufacturer=TDK, Manufacturer Part Number=C2012X7S2A105K125AB, Tolerance=±10%, Voltage=100V, Author="CERN DEM JLC", ComponentHeight=1.45mm, Component Type=Standard, CreateDate=12.12.2013, HelpURL=\\cern.ch\dfs\Applications\Altium\Datasheets\CC0805_X7S_TDK_C.pdf, LatestRevisionDate=20.01.2015, Mounted=Yes, Part Description="SMD Multilayer Chip Ceramic Capacitor", Part Number=CC0805_1UF_100V_10%_X7S, Pin Count=2, Sense=No, SMD=Yes, Socket=No, Status=None, TC=X7S
D1 D2: "Diode", Case=SOD523, Manufacturer=NEXPERIA, Power=70mA, Voltage=70V, Author=GK, Bonding=No, Component Type=Standard, ComponentHeight=0.65mm, CreateDate=11/09/2018, Device=1PS79SB70, HelpURL=\\cern.ch\dfs\Applications\Altium\Datasheets\BAS516.pdf, LatestRevisionDate=11/09/2018, Manufacturer Part Number=1PS79SB70, Mounted=Yes, PackageDescription="Ultra Small Outline Diode Flat Lead (SOD-523), Body; 1.2mm L X 0.8mm W X 0.65mm H, IPC Medium Density", Part Description="High-speed switching diode", Part Number=1PS79SB70, Pin Count=2, PressFit=No, Sense=No, SMD=Yes, Socket=No
D121: "TVS Diode for CAN", Case=SOT-23, Manufacturer=Nexperia, Power=400W, Voltage=24V, Author="CERN DEM JLC", Bonding=No, ComponentHeight=1.12mm, Component Type=Standard, CreateDate=03.09.2014, Device=PESD1CAN-UX, HelpURL=\\cern.ch\dfs\Applications\Altium\Datasheets\SM712.TCT.pdf, LatestRevisionDate=13.01.2015, Manufacturer Part Number=PESD1CAN-UX, Mounted=Yes, PackageDescription="SOT, 0.95mm, pitch; 3 pin,1.30mm W X 2.92mm L X 1.12mm H body, IPC Medium Density", Part Description="TVS Diode for CAN", Part Number=PESD1CAN-UX, Pin Count=3, PressFit=No, Sense=No, SMD=Yes, Socket=No
IC1: "2-Channel 1k Digital Potentiometer", Case=TSSOP14, Manufacturer="ANALOG DEVICES", Author=GK, Bonding=No, Component Type=Standard, ComponentHeight=1.75mm, CreateDate=09/11/2016, Device=AD8402ARUZ1, HelpURL=\\cern.ch\dfs\Applications\Altium\Datasheets\AD8402ARZ1.pdf, LatestRevisionDate=09/11/2016, Manufacturer Part Number=AD8402ARUZ1, Mounted=Yes, PackageDescription="SOP, 14-Leads, Body 5.1x4.5mm (max), Pitch 0.65mm, IPC Medium Density", Part Description="2-Channel 1k Digital Potentiometer", Part Number=AD8402ARUZ1, Pin Count=14, PressFit=No, Sense=No, SMD=Yes, Socket=No
IC2: "Operational Amplifier", Case=SOT23-5, Manufacturer="ANALOG DEVICES", Author="CERN DEM JLC", Bonding=No, Component Type=Standard, ComponentHeight=1.45mm, CreateDate=23/09/2010, Device=AD8009JRTZ-REEL7, HelpURL=\\cern.ch\dfs\Applications\Altium\Datasheets\AD8009JRTZ-REEL7.pdf, LatestRevisionDate=23/09/2010, Manufacturer Part Number=AD8009JRTZ-REEL7, Mounted=Yes, PackageDescription="SOT, 0.95mm pitch; 5 pin, 1.60mm W X 2.90mm L X 1.45mm H body, IPC Medium Density", Part Description="1GHz, 5,500 V/us Low Distortion Amplifier", Part Number=AD8009JRTZ-REEL7, Pin Count=5, PressFit=No, Sense=No, SMD=Yes, Socket=No
IC3: "3.3V CAN Transceivers with CAN FD (Flexible Data Rate)", Case=SOT23-8, Manufacturer="TEXAS INSTRUMENTS", Author="CERN DEM JLC", Bonding=No, Component Type=Standard, ComponentHeight=1.45mm, CreateDate=22/08/2017, Device=TCAN332GDCNT, HelpURL=\\cern.ch\dfs\Applications\Altium\Datasheets\TCAN332GDCNT.pdf, LatestRevisionDate=22/08/2017, Manufacturer Part Number=TCAN332GDCNT, Mounted=Yes, PackageDescription="SOT, 0.65mm Pitch; 8 pin, 1.625mm W X 2.90mm L X 1.45mm H body, IPC Medium Density", Part Description="3.3V CAN Transceivers with CAN FD (Flexible Data Rate)", Part Number=TCAN332GDCNT, Pin Count=8, PressFit=No, Sense=No, SMD=Yes, Socket=No
IC4: "3-Terminal Regulator 1=IN 2=OUT 3=GND", Case=SOT23, Manufacturer="ON SEMICONDUCTOR", Author="CERN DEM MR", Bonding=No, ComponentHeight=1.1mm, Component Type=Standard, CreateDate=05.10.2016, Device=NCP51460SN33T1G, HelpURL=\\cern.ch\dfs\Applications\Altium\Datasheets\NCP51460SN33T1G.pdf, LatestRevisionDate=05.10.2016, Manufacturer Part Number=NCP51460SN33T1G, Mounted=Yes, PackageDescription="SOT23 3-Leads, Pitch 0.95mm - Body 1.4x3mm, IPC Medium Density", Part Description="3.3V, 20mA Micropower Precision Voltage Reference", Part Number=NCP51460SN33T1G, Pin Count=3, PressFit=No, Sense=No, SMD=Yes, Socket=No
IC5: "2.5V/3.3V 1:2 Differential LVPECL Clock / Data Fanout Buffer", Case=QFN16, Manufacturer="ON SEMICONDUCTOR", Author="CERN DEM JLC", Bonding=No, ComponentHeight=1mm, Component Type=Standard, CreateDate=21.02.2018, Device=NB6L611MNG, HelpURL=\\cern.ch\dfs\Applications\Altium\Datasheets\NB6L611MNG.pdf, LatestRevisionDate=21.02.2018, Manufacturer Part Number=NB6L611MNG, Mounted=Yes, PackageDescription="QFN,0.50mm pitch,square; 4 pin X 4 pin, 3mm X 3mm X 1.00mm H body (w/thermal tab 1.85 X 1.85mm),  IPC Medium Density", Part Description="2.5V/3.3V 1:2 Differential LVPECL Clock / Data Fanout Buffer", Part Number=NB6L611MNG, Pin Count=17, PressFit=No, Sense=No, SMD=Yes, Socket=No
IC8: library part CMP-0055-00984-1, "1.5 GHz Fully Differential Amplifier, 8-pin LLP", Manufacturer="National Semiconductor", PackageTopMarking=XYTT*6552, PowerWise=Y, CompType=Amplifiers, DatasheetVersion=Sep-2007, PackageDescription="LLP, Plastic, Dual, 2.5 x 3.0 x 0.8mm Body, 8 Lead, 0.5mm Pitch, No Pullback", PackageReference=SDA08C, PackageVersion="revA, Jan-2004", PinCount=8, RoHS=Y
IC20A IC20B: library part CMP-0394-01258-2, "Single Output LDO, 50 mA, Adjustable 1.175 to 90 V Output, 7 to 100 V Input, 8-pin MSOP (DGN), -40 to 125 degC, Green (RoHS & no Sb/Br)", Manufacturer="Texas Instruments", Accuracy(%)=2.5, Code_JEDEC=MO-187, ComponentLink1Description="Manufacturer URL", ComponentLink1URL=http://www.ti.com/, ComponentLink2Description=Datasheet, ComponentLink2URL=http://www.ti.com/general/docs/lit/getliterature.tsp?genericPartNumber=TPS7A4001&fileType=pdf, ComponentLink3Description="Package Specification", ComponentLink3URL=http://www.ti.com/litv/pdf/mpds046e, DatasheetVersion=SBVS162A, Eco-Plan="Green (RoHS & no Sb/Br)", Iout(Max)(A)=0.05, Iq(Typ)(mA)=0.02, Mounting Technology="Surface Mount", PackageDescription="8-Pin Plastic Small Outline, Body 3 x 3 mm, Pitch 0.65 mm", PackageReference=DGN0008B, PackageVersion=4073271/F, PartNumber=TPS7A4001DGNR, SubFamily="Single Channel LDO", Vdo(Typ)(mV)=290, Vin(Max)(V)=100, Vin(Min)(V)=7, Vout Adj(Max)(V)=90, Vout Adj(Min)(V)=1.2
IC99: "3-Terminal Regulator 1=IN 2=OUT 3=GND", Case=SOT23, Manufacturer="DIODES INCORPORATED", Author="CERN DEM JLC", Bonding=No, ComponentHeight=1.35mm, Component Type=Standard, CreateDate=20.03.2018, Device=AP7313-33SAG-7, HelpURL=\\cern.ch\dfs\Applications\Altium\Datasheets\AP7313-33SAG-7.pdf, LatestRevisionDate=20.03.2018, Manufacturer Part Number=AP7313-33SAG-7, Mounted=Yes, PackageDescription="SOT23 3-Leads, Pitch 0.95mm - Body 1.3x2.9mm, IPC Medium Density", Part Description="3.3V, 150mA Low Quiescent Current, Fast Transient Low Dropout Linear Regulator", Part Number=AP7313-33SAG-7, Pin Count=3, PressFit=No, Sense=No, SMD=Yes, Socket=No
IC100: "256-Kbit Serial I²C Bus EEPROM", Case=TSSOP8, Manufacturer="ST MICROELECTRONICS", Part Number=M24256-BRDW6P, Author="CERN DEM MR", Bonding=No, ComponentHeight=1.2mm, Component Type=Standard, CreateDate=17.03.2016, Device=M24256-BRDW6, HelpURL=\\cern.ch\dfs\Applications\Altium\Datasheets\M24256-BRDW6P.pdf, LatestRevisionDate=17.03.2016, Manufacturer Part Number=M24256-BRDW6, Mounted=Yes, PackageDescription="SOP, 0.65mm pitch; 8 pin, 4.40mm W X 3.00mm L X 1.20mm H body, IPC Medium Density", Part Description="256-Kbit Serial I²C Bus EEPROM", Pin Count=8, PressFit=No, Sense=No, SMD=Yes, Socket=No
J1: library part AMPHENOL_MUSBRM5C1M0, "2x12 Pin + 6G + 1 Shield  USB Type C Receptacle", Manufacturer=AMPHENOL, Manufacturer Part Number=MUSBRM5C1M0, Author="CERN DEM BC", Component Type=Standard, ComponentHeight=14.95mm, CreateDate=26/02/2020, Family="USB C", HelpURL=\\cern.ch\dfs\Applications\Altium\Datasheets\AMPHENOL_MUSBRM5C1M0.pdf, LatestRevisionDate=26/02/2020, Mounted=Yes, Part Description="1 Port Vertical Receptacle 24 Contacts Rugged USB Type C Input Output Connector", Part Number=AMPHENOL_MUSBRM5C1M0, Pin Count=31, PressFit=No, Sense=No, SMD=No, Socket=No, Status=None
J2: "Connector", Manufacturer_Name=3M, Manufacturer_Part_Number=45210-600230, Mouser Part Number=517-45210-600230, RS Part Number=8273691, Allied_Number=70331440, Allied Price/Stock=https://www.alliedelec.com/3m-45210-600230/70331440/, Datasheet Link=http://multimedia.3m.com/mws/media/905148O/3m-shrouded-boardmount-header-452-series-cd2437.pdf, Height=7.468mm, Mouser Price/Stock=https://www.mouser.com/Search/Refine.aspx?Keyword=517-45210-600230, RS Price/Stock=https://uk.rs-online.com/web/p/products/8273691
J3: library part MOLEX_52745-1097, "Connector 10 Female", Manufacturer=MOLEX, Manufacturer Part Number=52745-1097, Author="CERN DEM JLC", ComponentHeight=2mm, Component Type=Standard, CreateDate=04.11.2014, Family=FFC/FPC, HelpURL=\\cern.ch\dfs\Applications\Altium\Datasheets\MOLEX_52745-1097.pdf, LatestRevisionDate=05.12.2014, Mounted=Yes, Part Description="10 Contacts, 0.5mm Pitch, Right Angled Surface Mount FFC/FPC Connector, ZIF, Top Contact Style", Part Number=MOLEX_52745-1097, Pin Count=10, PressFit=No, Sense=No, SMD=Yes, Socket=No, Status=None
JP10: library part "CON_2x5 1.27 SMT Male", "1.27 mm dual row goldpin (Harwin)"
L1 L6: library part IND0402_MURATA_BLM15PX121SN1D, Case=0402, Manufacturer=MURATA, Manufacturer Part Number=BLM15PX121SN1D, Power=2A, Resistance=0.055R, Tolerance=±25%, Author="CERN DEM JMW", ComponentHeight=0.55mm, Component Type=Standard, CreateDate=19.02.2014, HelpURL=\\cern.ch\dfs\Applications\Altium\Datasheets\IND0402_MURATA_BLM15PX.pdf, LatestRevisionDate=25.10.2018, Mounted=Yes, Part Description="SMD EMIFIL Chip Ferrite Bead", Part Number=IND0402_MURATA_BLM15PX121SN1D, Pin Count=2, Sense=No, SMD=Yes, Socket=No, Status=None
Q1: library part XTAL_8MHZ_TXC_7A-8.000MAAE-T, "Quartz Crystal", Manufacturer="TXC CORPORATION", Manufacturer Part Number=7A-8.000MAAE-T, Author="CERN DEM JLC", Bonding=No, ComponentHeight=1.2mm, Component Type=Standard, CreateDate=09.10.2014, HelpURL=\\cern.ch\dfs\Applications\Altium\Datasheets\XTAL_TXC_7A.pdf, LatestRevisionDate=12.11.2014, Mounted=Yes, PackageDescription="2 Pins, 3.2x5mm, SMD Glass Seam Sealing Crystal, 7A Serie", Part Description="Tolerance: ±30ppm, Stability: ±30ppm, -20°C to +70°C, 12pF, SMD Glass Seam Sealing Crystal, 7A Series", Part Number=XTAL_8MHZ_TXC_7A-8.000MAAE-T, Pin Count=2, PressFit=No, Sense=No, SMD=Yes, Socket=No
R1 R5 R7 R8 R12 R13 R18 R19 R101: library part R0402_5K1_1%_0.0625W_100PPM, "Resistor - 1%", Case=0402, Manufacturer=GENERIC, Manufacturer1 ComponentHeight=0.4mm, Manufacturer1 Example="YAGEO PHYCOMP", Manufacturer1 Part Number=232270675102L, Power=0.0625W, Tolerance=±1%, Author="CERN DEM JLC", Component Type=Standard, CreateDate=03.12.2007, HelpURL=\\cern.ch\dfs\Applications\Altium\Datasheets\R0402_Phycomp_RC0402.pdf, LatestRevisionDate=17.10.2012, Manufacturer Part Number=R0402_5K1_1%_0.0625W_100PPM, Mounted=Yes, Part Description="General Purpose Thick Film Chip Resistor", Part Number=R0402_5K1_1%_0.0625W_100PPM, Pin Count=2, PressFit=No, Sense=No, SMD=Yes, Socket=No, Status="Not Recommended", TC=±100ppm/°C
R2 R3 R4 R6 R106 R422 R425: library part R0402_1K_1%_0.0625W_100PPM, "Resistor - 1%", Case=0402, Manufacturer=GENERIC, Manufacturer1 ComponentHeight=0.4mm, Manufacturer1 Example="YAGEO PHYCOMP", Manufacturer1 Part Number=232270671002L, Power=0.0625W, Tolerance=±1%, Author="CERN DEM JLC", Component Type=Standard, HelpURL=\\cern.ch\dfs\Applications\Altium\Datasheets\R0402_Phycomp_RC0402.pdf, Manufacturer Part Number=R0402_1K_1%_0.0625W_100PPM, Mounted=Yes, Part Description="General Purpose Thick Film Chip Resistor", Part Number=R0402_1K_1%_0.0625W_100PPM, Pin Count=2, PressFit=No, Sense=No, SMD=Yes, Socket=No, Status="Not Recommended", TC=±100ppm/°C
  R2 R3 R4 R6 R106: CreateDate=03/12/2007, LatestRevisionDate=17/10/2012
  R422 R425: CreateDate=03.12.2007, LatestRevisionDate=17.10.2012
R9 R10 R44 R63 R67 R68A R68B R88A R88B R430: library part R0402_10K_1%_0.0625W_100PPM, "Resistor - 1%", Case=0402, Manufacturer=GENERIC, Manufacturer1 ComponentHeight=0.4mm, Manufacturer1 Example="YAGEO PHYCOMP", Manufacturer1 Part Number=232270671003L, Power=0.0625W, Tolerance=±1%, Author="CERN DEM JLC", Component Type=Standard, CreateDate=03.12.2007, HelpURL=\\cern.ch\dfs\Applications\Altium\Datasheets\R0402_Phycomp_RC0402.pdf, LatestRevisionDate=17.10.2012, Manufacturer Part Number=R0402_10K_1%_0.0625W_100PPM, Mounted=Yes, Part Description="General Purpose Thick Film Chip Resistor", Part Number=R0402_10K_1%_0.0625W_100PPM, Pin Count=2, PressFit=No, Sense=No, SMD=Yes, Socket=No, Status="Not Recommended", TC=±100ppm/°C
R11A R11B: library part R0402_2k_1%_0.0625W_100PPM, "Resistor - 1%", Case=0402, Manufacturer=GENERIC, Manufacturer1 ComponentHeight=0.4mm, Manufacturer1 Example="YAGEO PHYCOMP", Manufacturer1 Part Number=232270672002L, Manufacturer Part Number=R0402_2K_1%_0.0625W_100PPM, Power=0.0625W, Tolerance=±1%, Author="CERN DEM JLC", Component Type=Standard, CreateDate=03/12/2007, HelpURL=\\cern.ch\dfs\Applications\Altium\Datasheets\R0402_Phycomp_RC0402.pdf, LatestRevisionDate=17/10/2012, Mounted=Yes, Part Description="General Purpose Thick Film Chip Resistor", Part Number=R0402_2K_1%_0.0625W_100PPM, Pin Count=2, PressFit=No, Sense=No, SMD=Yes, Socket=No, Status="Not Recommended", TC=±100ppm/°C
R29 R48 R102 R103: library part R0603_22R_1%_0.1W_100PPM, "Resistor - 1%", Case=0603, Manufacturer=GENERIC, Manufacturer1 ComponentHeight=0.55mm, Manufacturer1 Example="NIC COMPONENT", Manufacturer1 Part Number=NRC06F22R0TRF, Power=0.1W, Tolerance=±1%, Author="CERN DEM JLC", Component Type=Standard, CreateDate=03.12.2007, HelpURL=\\cern.ch\dfs\Applications\Altium\Datasheets\R0603_NIC_NRC.pdf, LatestRevisionDate=13.03.2008, Manufacturer Part Number=R0603_22R_1%_0.1W_100PPM, Mounted=Yes, Part Description="General Purpose Thick Film Chip Resistor", Part Number=R0603_22R_1%_0.1W_100PPM, Pin Count=2, PressFit=No, Sense=No, SMD=Yes, Socket=No, Status=Preferred, TC=±100ppm/°C
R45 R50 R104: library part R0402_270R_1%_0.0625W_100PPM, "Resistor - 1%", Case=0402, Manufacturer=GENERIC, Manufacturer1 ComponentHeight=0.4mm, Manufacturer1 Example="YAGEO PHYCOMP", Manufacturer1 Part Number=232270672701L, Power=0.0625W, Tolerance=±1%, Author="CERN DEM JLC", Component Type=Standard, CreateDate=03.12.2007, HelpURL=\\cern.ch\dfs\Applications\Altium\Datasheets\R0402_Phycomp_RC0402.pdf, LatestRevisionDate=17.10.2012, Manufacturer Part Number=R0402_270R_1%_0.0625W_100PPM, Mounted=Yes, Part Description="General Purpose Thick Film Chip Resistor", Part Number=R0402_270R_1%_0.0625W_100PPM, Pin Count=2, PressFit=No, Sense=No, SMD=Yes, Socket=No, Status="Not Recommended", TC=±100ppm/°C
R46 R66 R107 R110: library part R0402_240R_1%_0.0625W_100PPM, "Resistor - 1%", Case=0402, Manufacturer=GENERIC, Manufacturer1 ComponentHeight=0.4mm, Manufacturer1 Example="YAGEO PHYCOMP", Manufacturer1 Part Number=232270672401L, Power=0.0625W, Tolerance=±1%, Author="CERN DEM JLC", Component Type=Standard, CreateDate=03.12.2007, HelpURL=\\cern.ch\dfs\Applications\Altium\Datasheets\R0402_Phycomp_RC0402.pdf, LatestRevisionDate=17.10.2012, Manufacturer Part Number=R0402_240R_1%_0.0625W_100PPM, Mounted=Yes, Part Description="General Purpose Thick Film Chip Resistor", Part Number=R0402_240R_1%_0.0625W_100PPM, Pin Count=2, PressFit=No, Sense=No, SMD=Yes, Socket=No, Status="Not Recommended", TC=±100ppm/°C
R47: library part R0402_120R_1%_0.0625W_100PPM, "Resistor - 1%", Case=0402, Manufacturer=GENERIC, Manufacturer1 ComponentHeight=0.4mm, Manufacturer1 Example="YAGEO PHYCOMP", Manufacturer1 Part Number=232270671201L, Power=0.0625W, Tolerance=±1%, Author="CERN DEM JLC", Component Type=Standard, CreateDate=03.12.2007, HelpURL=\\cern.ch\dfs\Applications\Altium\Datasheets\R0402_Phycomp_RC0402.pdf, LatestRevisionDate=17.10.2012, Manufacturer Part Number=R0402_120R_1%_0.0625W_100PPM, Mounted=Yes, Part Description="General Purpose Thick Film Chip Resistor", Part Number=R0402_120R_1%_0.0625W_100PPM, Pin Count=2, PressFit=No, Sense=No, SMD=Yes, Socket=No, Status="Not Recommended", TC=±100ppm/°C
R49 R105: library part R0402_510R_1%_0.0625W_100PPM, "Resistor - 1%", Case=0402, Manufacturer=GENERIC, Manufacturer1 ComponentHeight=0.4mm, Manufacturer1 Example="YAGEO PHYCOMP", Manufacturer1 Part Number=232270675101L, Power=0.0625W, Tolerance=±1%, Author="CERN DEM JLC", Component Type=Standard, CreateDate=03.12.2007, HelpURL=\\cern.ch\dfs\Applications\Altium\Datasheets\R0402_Phycomp_RC0402.pdf, LatestRevisionDate=17.10.2012, Manufacturer Part Number=R0402_510R_1%_0.0625W_100PPM, Mounted=Yes, Part Description="General Purpose Thick Film Chip Resistor", Part Number=R0402_510R_1%_0.0625W_100PPM, Pin Count=2, PressFit=No, Sense=No, SMD=Yes, Socket=No, Status="Not Recommended", TC=±100ppm/°C
R51: library part R0402_47K_1%_0.0625W_100PPM, "Resistor - 1%", Case=0402, Manufacturer=GENERIC, Manufacturer1 ComponentHeight=0.4mm, Manufacturer1 Example="YAGEO PHYCOMP", Manufacturer1 Part Number=232270675103L, Power=0.0625W, Tolerance=±1%, Author="CERN DEM JLC", Component Type=Standard, CreateDate=03.12.2007, HelpURL=\\cern.ch\dfs\Applications\Altium\Datasheets\R0402_Phycomp_RC0402.pdf, LatestRevisionDate=17.10.2012, Manufacturer Part Number=R0402_47K_1%_0.0625W_100PPM, Mounted=Yes, Part Description="General Purpose Thick Film Chip Resistor", Part Number=R0402_47K_1%_0.0625W_100PPM, Pin Count=2, PressFit=No, Sense=No, SMD=Yes, Socket=No, Status="Not Recommended", TC=±100ppm/°C
R71: library part R0402_49R9_1%_0.0625W_100PPM, "Resistor - 1%", Case=0402, Manufacturer=GENERIC, Manufacturer1 ComponentHeight=0.4mm, Manufacturer1 Example="YAGEO PHYCOMP", Manufacturer1 Part Number="232270674999L or RC0402FR-0749R9L", Power=0.0625W, Tolerance=±1%, Author="CERN DEM JLC", Component Type=Standard, CreateDate=2012-10-24, HelpURL=\\cern.ch\dfs\Applications\Altium\Datasheets\R0402_Phycomp_RC0402.pdf, LatestRevisionDate=2012-10-24, Manufacturer Part Number=R0402_49R9_1%_0.0625W_100PPM, Mounted=Yes, Part Description="General Purpose Thick Film Chip Resistor", Part Number=R0402_49R9_1%_0.0625W_100PPM, Pin Count=2, SMD=Yes, Socket=No, Status="Not recommended", Table="Resistors SMD", TC=±100ppm/°C
R85A R85B: library part R0402_300R_1%_0.0625W_100PPM, "Resistor - 1%", Case=0402, Manufacturer=GENERIC, Manufacturer1 ComponentHeight=0.4mm, Manufacturer1 Example="YAGEO PHYCOMP", Manufacturer1 Part Number=232270673001L, Power=0.0625W, Tolerance=±1%, Author="CERN DEM JLC", Component Type=Standard, CreateDate=03.12.2007, HelpURL=\\cern.ch\dfs\Applications\Altium\Datasheets\R0402_Phycomp_RC0402.pdf, LatestRevisionDate=17.10.2012, Manufacturer Part Number=R0402_300R_1%_0.0625W_100PPM, Mounted=Yes, Part Description="General Purpose Thick Film Chip Resistor", Part Number=R0402_300R_1%_0.0625W_100PPM, Pin Count=2, PressFit=No, Sense=No, SMD=Yes, Socket=No, Status="Not Recommended", TC=±100ppm/°C
R86A R86B R154A R154B: library part R0402_1K5_1%_0.0625W_100PPM, "Resistor - 1%", Case=0402, Manufacturer=GENERIC, Manufacturer1 ComponentHeight=0.4mm, Manufacturer1 Example="YAGEO PHYCOMP", Manufacturer1 Part Number=232270671502L, Power=0.0625W, Tolerance=±1%, Author="CERN DEM JLC", Component Type=Standard, CreateDate=03.12.2007, HelpURL=\\cern.ch\dfs\Applications\Altium\Datasheets\R0402_Phycomp_RC0402.pdf, LatestRevisionDate=17.10.2012, Manufacturer Part Number=R0402_1K5_1%_0.0625W_100PPM, Mounted=Yes, Part Description="General Purpose Thick Film Chip Resistor", Part Number=R0402_1K5_1%_0.0625W_100PPM, Pin Count=2, PressFit=No, Sense=No, SMD=Yes, Socket=No, Status="Not Recommended", TC=±100ppm/°C
R87A R87B: library part R0402_16K_1%_0.0625W_100PPM, "Resistor - 1%", Case=0402, Manufacturer=GENERIC, Manufacturer1 ComponentHeight=0.4mm, Manufacturer1 Example="YAGEO PHYCOMP", Manufacturer1 Part Number=232270671603L, Power=0.0625W, Tolerance=±1%, Author="CERN DEM JLC", Component Type=Standard, CreateDate=03/12/2007, HelpURL=\\cern.ch\dfs\Applications\Altium\Datasheets\R0402_Phycomp_RC0402.pdf, LatestRevisionDate=17/10/2012, Manufacturer Part Number=R0402_16K_1%_0.0625W_100PPM, Mounted=Yes, Part Description="General Purpose Thick Film Chip Resistor", Part Number=R0402_16K_1%_0.0625W_100PPM, Pin Count=2, PressFit=No, Sense=No, SMD=Yes, Socket=No, Status="Not Recommended", TC=±100ppm/°C
R94A R94B: library part R0805_33K_1%_0.125W_100PPM, "Resistor - 1%", Case=0805, Manufacturer=GENERIC, Manufacturer1 ComponentHeight=0.6mm, Manufacturer1 Example="NIC COMPONENT", Manufacturer1 Part Number=NRC10F3302TRF, Power=0.125W, Tolerance=±1%, Author="CERN DEM JLC", Component Type=Standard, CreateDate=03.12.2007, HelpURL=\\cern.ch\dfs\Applications\Altium\Datasheets\R0805_NIC_NRC.pdf, LatestRevisionDate=13.03.2008, Manufacturer Part Number=R0805_33K_1%_0.125W_100PPM, Mounted=Yes, Part Description="General Purpose Thick Film Chip Resistor", Part Number=R0805_33K_1%_0.125W_100PPM, Pin Count=2, PressFit=No, Sense=No, SMD=Yes, Socket=No, Status=Preferred, TC=±100ppm/°C